# EAGLE board boneclamp_rB (EAGLE 6.4)
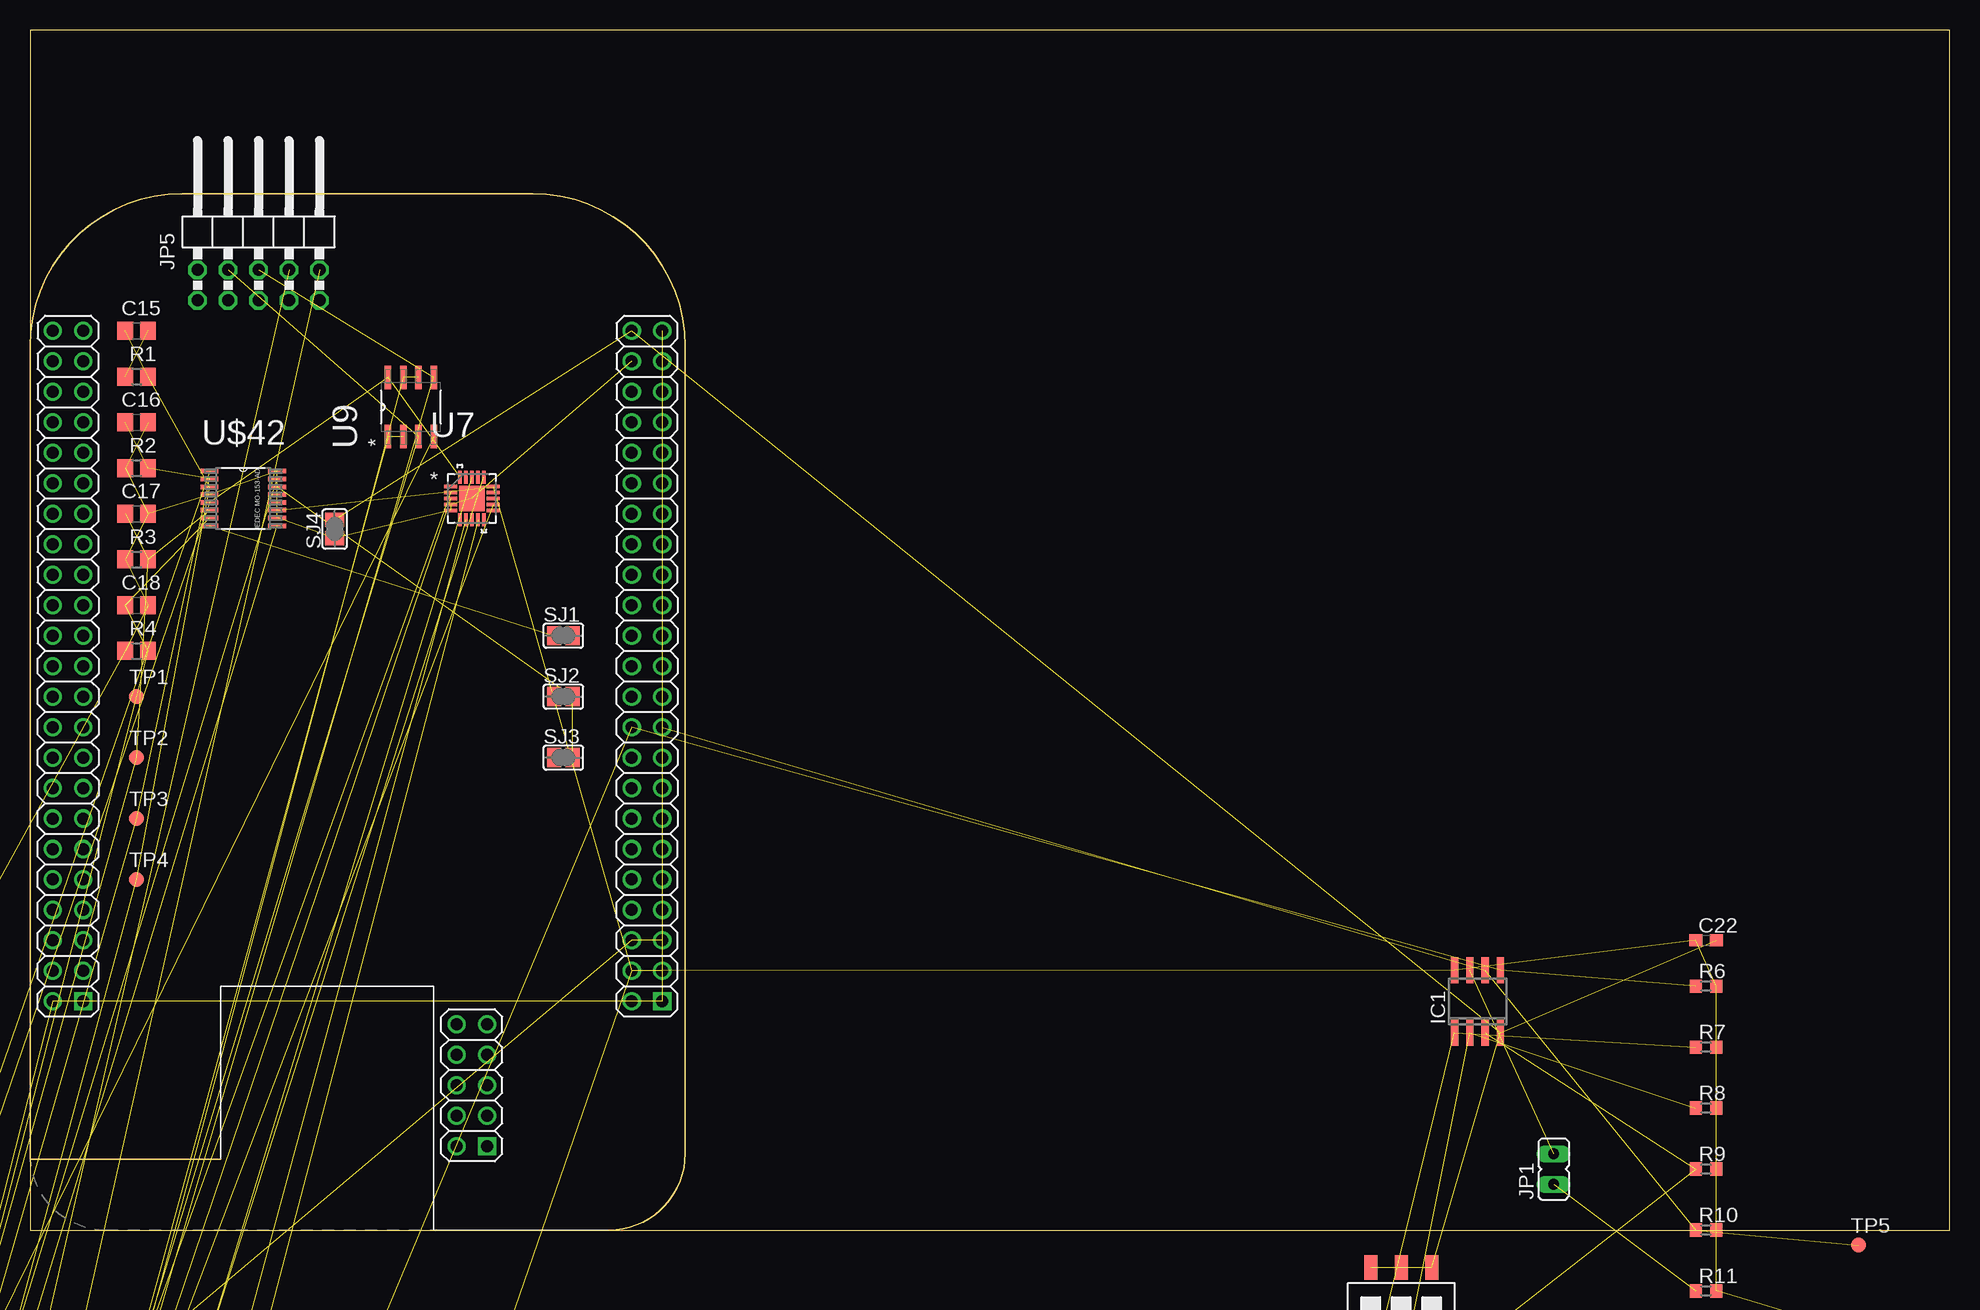
[diagram p0: board, top side]
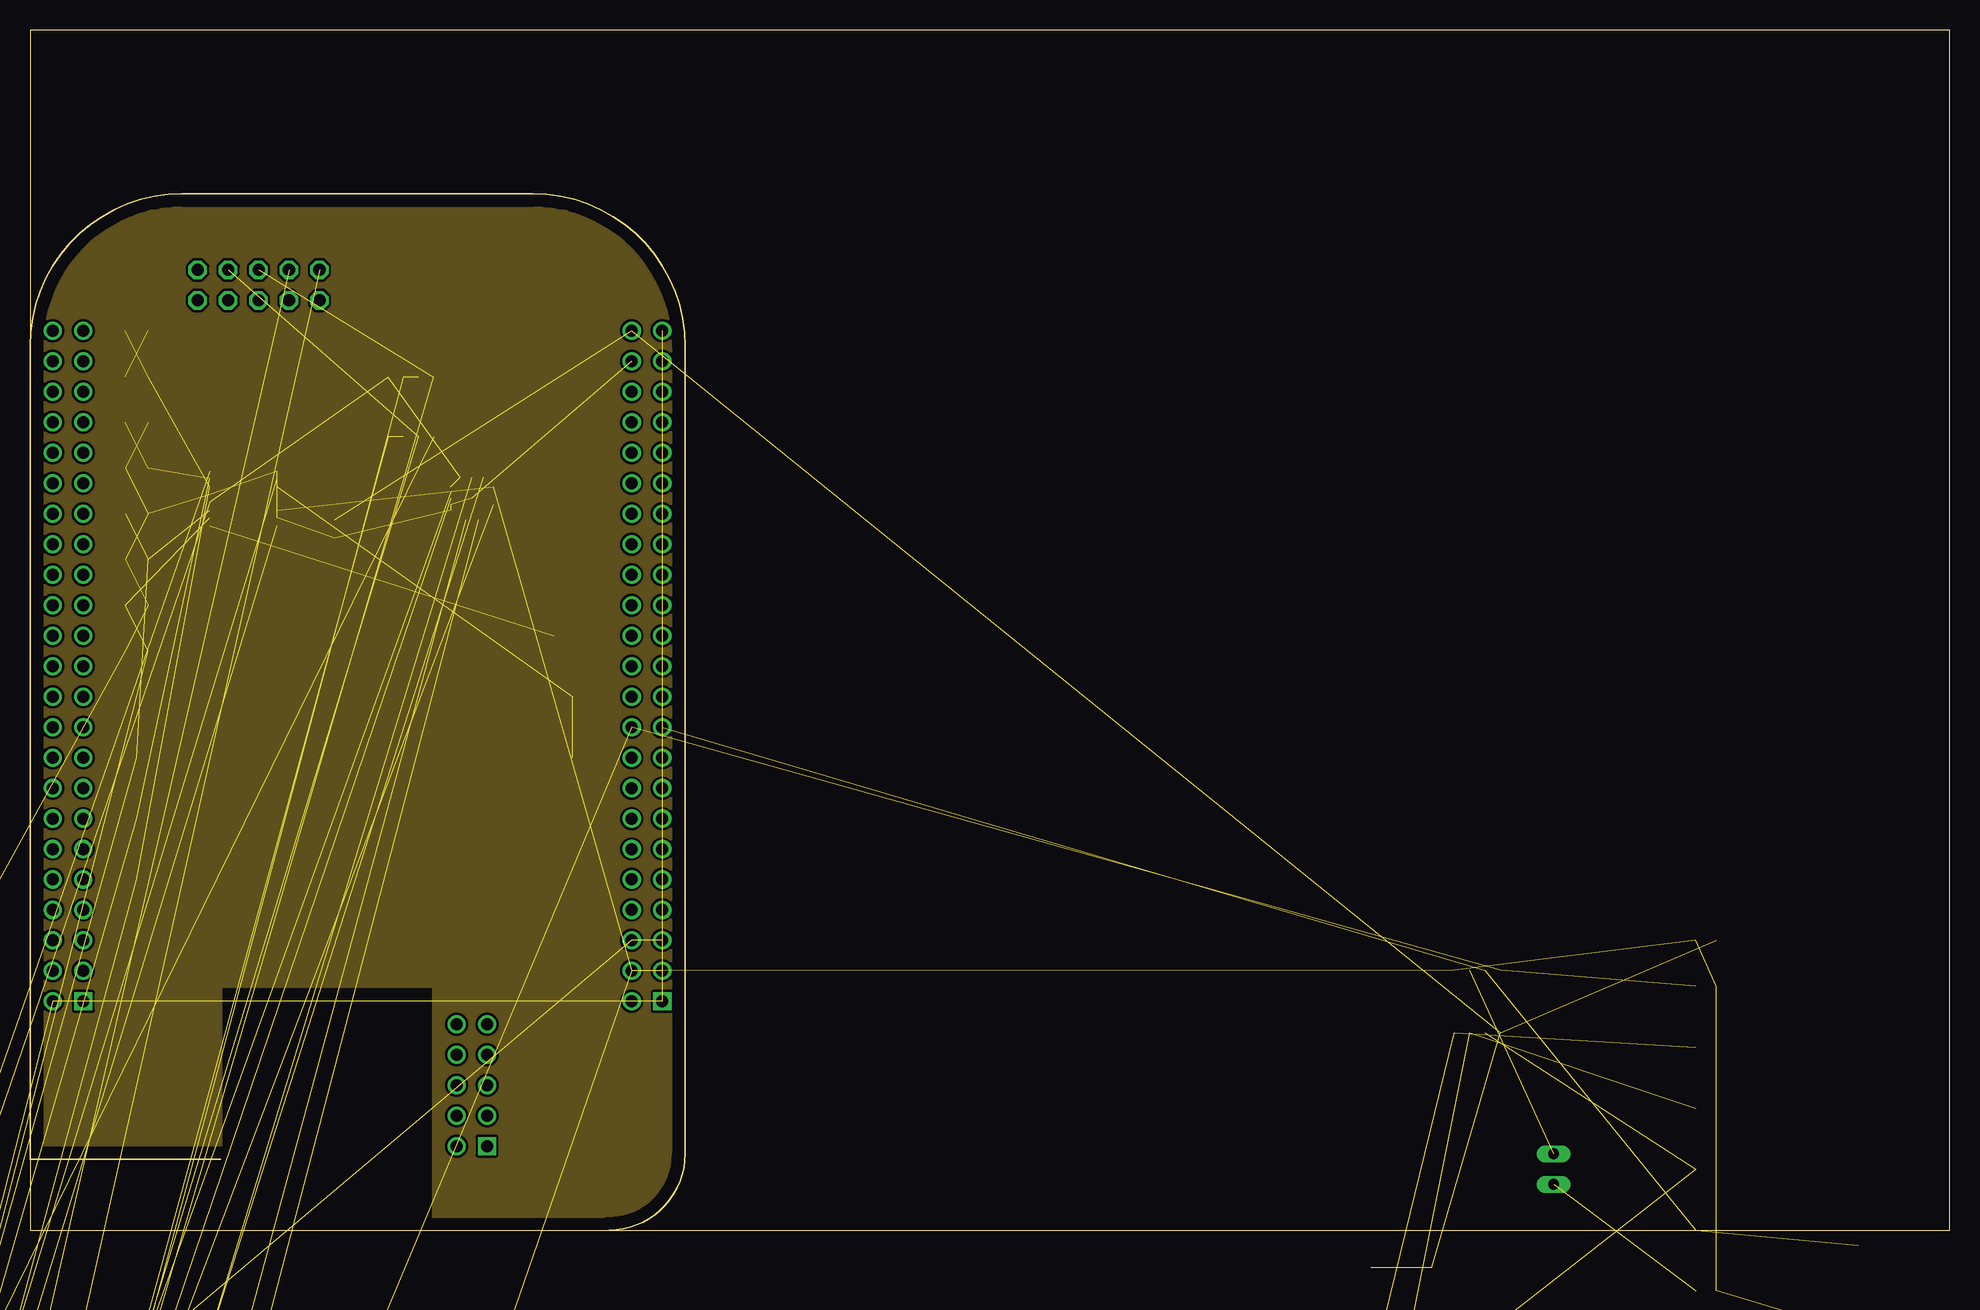
[diagram p1: board, inner layer Route2]
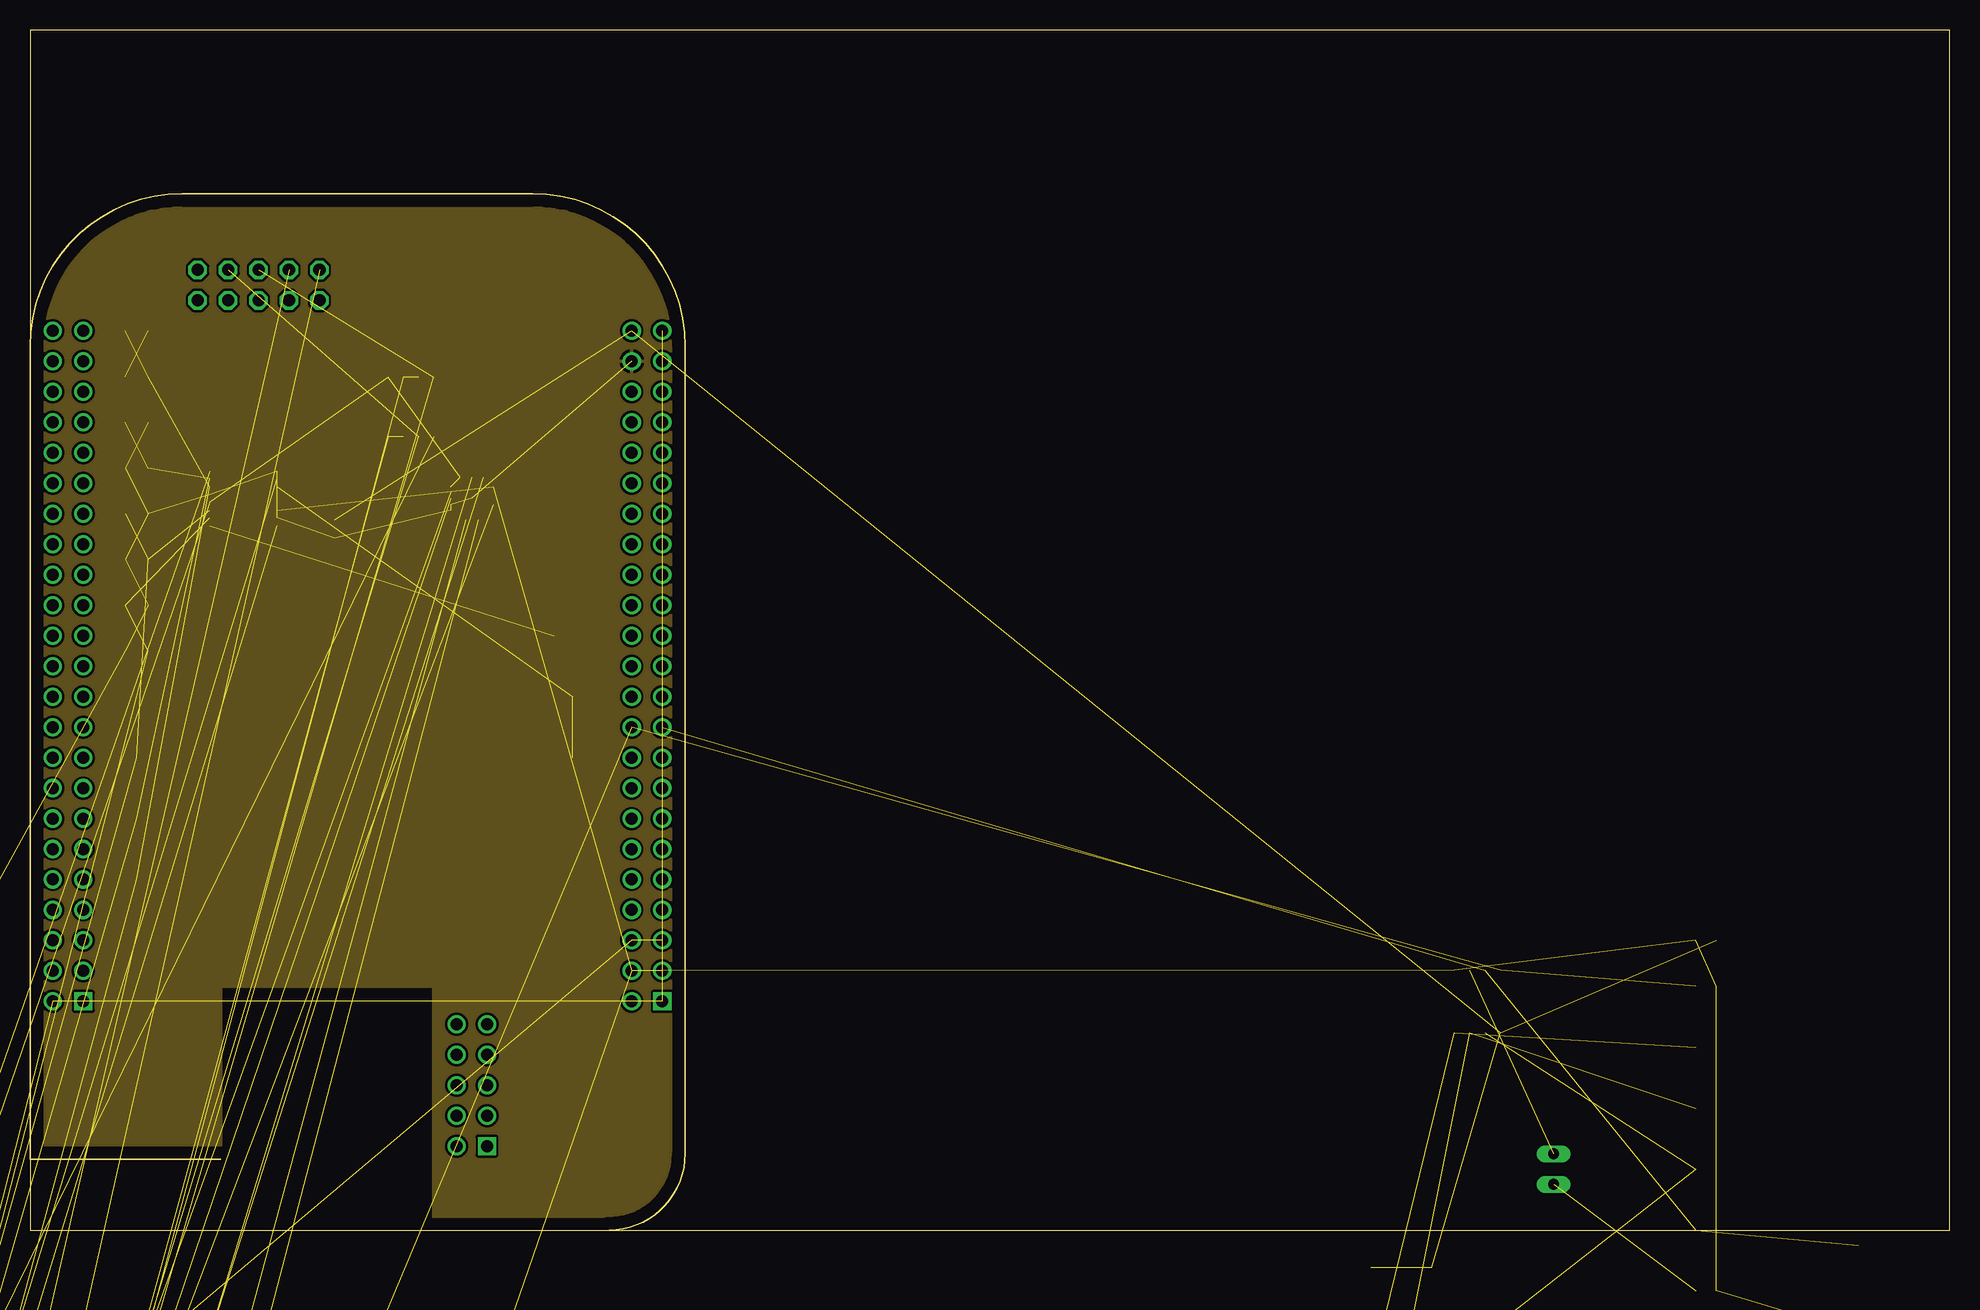
[diagram p2: board, inner layer Route15]

Size 160 x 100 mm. Coordinates in mm from the lower left corner, seen from the top.
Outline: 0,0 160,0 160,100 0,100 0,0
Copper layers (1+2*15+16): Top 0.035mm / dielectric 1.5mm / Route2 0.035mm / dielectric 0.15mm / Route15 0.035mm / dielectric 0.2mm / Bottom 0.035mm
Design rules "default *": minimum track width 10mil, minimum drill 24mil, track to track 8mil, track to pad 8mil, pad to pad 8mil, via to via 8mil, smd to smd 8mil, copper to edge 40mil, drill to drill 8mil, minimum pad ring 10mil, minimum via ring 8mil, stop-mask expansion 4mil, vias tented up to drill 0mil, thermal gap 10mil

## Footprints (pad centres in the part's own frame; a part is rotated, then mirrored left to right if it is on the bottom)
C0805 = smd 1.3 x 1.5: 1 -0.95,0; 2 0.95,0
C0603 = smd 1.1 x 1: 1 -0.85,0; 2 0.85,0
C025-025X050 = drill 0.813 octagon: 1 -1.27,0; 2 1.27,0
DO-219AB = smd 1.3 x 1.4: P$1 0,0; P$2 2.9,0
SO-08 = smd 0.6 x 2.2: 1 -1.905,-2.6; 2 -0.635,-2.6; 3 0.635,-2.6; 4 1.905,-2.6; 5 1.905,2.6; 6 0.635,2.6; 7 -0.635,2.6; 8 -1.905,2.6
JP1 = drill 0.914 long: 1 0,-1.27; 2 0,1.27
2X05/90 = drill 1.016 octagon: 1 -5.08,-5.08; 2 -5.08,-2.54; 3 -2.54,-5.08; 4 -2.54,-2.54; 5 0,-5.08; 6 0,-2.54; 7 2.54,-5.08; 8 2.54,-2.54; 9 5.08,-5.08; 10 5.08,-2.54
L4012M = smd 1.3 x 2.2: 1 -1.45,0; 2 1.45,0
R0805 = smd 1.3 x 1.5: 1 -0.95,0; 2 0.95,0
R0603 = smd 1 x 1.1: 1 -0.85,0; 2 0.85,0
R0805' = smd 1.3 x 1.5: 1 -0.85,0; 2 0.85,0
0204V = drill 0.813 octagon: 1 -1.27,0; 2 1.27,0
SMS-003 = smd 1.092 x 2.007: 1 -2.54,-4.496; 2 0,-4.496; 3 2.54,-4.496; 4 2.54,4.496; 5 0,4.496; 6 -2.54,4.496
SJ = smd 1.168 x 1.6: 1 -0.762,0; 2 0.762,0
B1,27 = smd 1.27 x 1.27: TP 0,0
SOIC127P600X175-8N = smd 1.981 x 0.559: 1 -2.464,1.905; 2 -2.464,0.635; 3 -2.464,-0.635; 4 -2.464,-1.905; 5 2.464,-1.905; 6 2.464,-0.635; 7 2.464,0.635; 8 2.464,1.905
SOT95P280X100-5N = smd 1.219 x 0.508: 1 -1.219,0.94; 2 -1.219,0; 3 -1.219,-0.94; 4 1.219,-0.94; 5 1.219,0.94
SOT95P280X110-5N = smd 1.321 x 0.559: 1 -1.295,0.94; 2 -1.295,0; 3 -1.295,-0.94; 4 1.295,-0.94; 5 1.295,0.94
SOIC127P1032X265-16N = smd 1.981 x 0.533: 1 -4.699,4.445; 2 -4.699,3.175; 3 -4.699,1.905; 4 -4.699,0.635; 5 -4.699,-0.635; 6 -4.699,-1.905; 7 -4.699,-3.175; 8 -4.699,-4.445; 9 4.699,-4.445; 10 4.699,-3.175; 11 4.699,-1.905; 12 4.699,-0.635; 13 4.699,0.635; 14 4.699,1.905; 15 4.699,3.175; 16 4.699,4.445
QFN50P400X400X100-21N = smd 1.067 x 0.305: 1 -1.778,0.991; 2 -1.778,0.508; 3 -1.778,0; 4 -1.778,-0.508; 5 -1.778,-0.991; 11 1.778,-0.991; 12 1.778,-0.508; 13 1.778,0; 14 1.778,0.508; 15 1.778,0.991 | smd 0.305 x 1.067: 6 -0.991,-1.778; 7 -0.508,-1.778; 8 0,-1.778; 9 0.508,-1.778; 10 0.991,-1.778; 16 0.991,1.778; 17 0.508,1.778; 18 0,1.778; 19 -0.508,1.778; 20 -0.991,1.778 | smd 2.108 x 2.108: 21 0,0
SON50P300X300X100-11N = smd 0.813 x 0.305: 1 -1.473,0.991; 2 -1.473,0.508; 3 -1.473,0; 4 -1.473,-0.508; 5 -1.473,-0.991; 6 1.473,-0.991; 7 1.473,-0.508; 8 1.473,0; 9 1.473,0.508; 10 1.473,0.991 | smd 1.651 x 2.388: 11 0,0
BEAGLEBONE_SHIELD = drill 1 square: 1 4.445,19.05; 47 52.705,19.05; 93 38.1,6.985 | drill 1: 2 1.905,19.05; 3 4.445,21.59; 4 1.905,21.59; 5 4.445,24.13; 6 1.905,24.13; 7 4.445,26.67; 8 1.905,26.67; 9 4.445,29.21; 10 1.905,29.21; 11 4.445,31.75; 12 1.905,31.75; 13 4.445,34.29; 14 1.905,34.29; 15 4.445,36.83; 16 1.905,36.83; 17 4.445,39.37; 18 1.905,39.37; 19 4.445,41.91; 20 1.905,41.91; 21 4.445,44.45; 22 1.905,44.45; 23 4.445,46.99; 24 1.905,46.99; 25 4.445,49.53; 26 1.905,49.53; 27 4.445,52.07; 28 1.905,52.07; 29 4.445,54.61; 30 1.905,54.61; 31 4.445,57.15; 32 1.905,57.15; 33 4.445,59.69; 34 1.905,59.69; 35 4.445,62.23; 36 1.905,62.23; 37 4.445,64.77; 38 1.905,64.77; 39 4.445,67.31; 40 1.905,67.31; 41 4.445,69.85; 42 1.905,69.85; 43 4.445,72.39; 44 1.905,72.39; 45 4.445,74.93; 46 1.905,74.93; 48 50.165,19.05; 49 52.705,21.59; 50 50.165,21.59; 51 52.705,24.13; 52 50.165,24.13; 53 52.705,26.67; 54 50.165,26.67; 55 52.705,29.21; 56 50.165,29.21; 57 52.705,31.75; 58 50.165,31.75; 59 52.705,34.29; 60 50.165,34.29; 61 52.705,36.83; 62 50.165,36.83; 63 52.705,39.37; 64 50.165,39.37; 65 52.705,41.91; 66 50.165,41.91; 67 52.705,44.45; 68 50.165,44.45; 69 52.705,46.99; 70 50.165,46.99; 71 52.705,49.53; 72 50.165,49.53; 73 52.705,52.07; 74 50.165,52.07; 75 52.705,54.61; 76 50.165,54.61; 77 52.705,57.15; 78 50.165,57.15; 79 52.705,59.69; 80 50.165,59.69; 81 52.705,62.23; 82 50.165,62.23; 83 52.705,64.77; 84 50.165,64.77; 85 52.705,67.31; 86 50.165,67.31; 87 52.705,69.85; 88 50.165,69.85; 89 52.705,72.39; 90 50.165,72.39; 91 52.705,74.93; 92 50.165,74.93; 94 35.56,6.985; 95 38.1,9.525; 96 35.56,9.525; 97 38.1,12.065; 98 35.56,12.065; 99 38.1,14.605; 100 35.56,14.605; 101 38.1,17.145; 102 35.56,17.145
MO-153-AB = smd 1.473 x 0.356: 1 -2.819,2.286; 2 -2.819,1.626; 3 -2.819,0.965; 4 -2.819,0.33; 5 -2.819,-0.33; 6 -2.819,-0.965; 7 -2.819,-1.626; 8 -2.819,-2.286; 9 2.819,-2.286; 10 2.819,-1.626; 11 2.819,-0.965; 12 2.819,-0.33; 13 2.819,0.33; 14 2.819,0.965; 15 2.819,1.626; 16 2.819,2.286
SOP63P500X150-16N = smd 1.75 x 0.3: 1 0,0; 2 0,-0.635; 3 0,-1.27; 4 0,-1.905; 5 0,-2.54; 6 0,-3.175; 7 0,-3.81; 8 0,-4.445; 9 5.2,-4.445; 10 5.2,-3.81; 11 5.2,-3.175; 12 5.2,-2.54; 13 5.2,-1.905; 14 5.2,-1.27; 15 5.2,-0.635; 16 5.2,0

## Placement (x,y rotation side)
C1  10uF  [C0805]  -111.76,-314.96 0 top  (outside the outline)
C2  0.1uF  [C0805]  -119.38,-355.6 0 top  (outside the outline)
C3  10uF  [C0805]  -119.38,-366.39 0 top  (outside the outline)
C4  0.1uF  [C0805]  -119.38,-372.75 0 top  (outside the outline)
C5  1uF  [C0603]  -83.82,-177.8 0 top  (outside the outline)
C6  10nF  [C0603]  -83.82,-184.15 0 top  (outside the outline)
C7  10uF  [C0603]  -83.82,-190.5 0 top  (outside the outline)
C8  1uF  [C0603]  -83.82,-229.87 0 top  (outside the outline)
C9  1uF  [C0603]  -83.82,-236.22 0 top  (outside the outline)
C10  10uF  [C0805]  -83.82,-254 0 top  (outside the outline)
C11  10uF  [C0805]  -83.82,-273.05 0 top  (outside the outline)
C12  0.1uF  [C0805]  -46.99,-261.62 0 top  (outside the outline)
C13  0.1uF  [C0805]  -83.82,-285.75 0 top  (outside the outline)
C14  0.1uF  [C0805]  -83.82,-292.1 0 top  (outside the outline)
C15  [C0805]  8.89,74.93 0 top
C16  [C0805]  8.89,67.31 0 top
C17  [C0805]  8.89,59.69 0 top
C18  [C0805]  8.89,52.07 0 top
C19  0.1uF  [C0805]  -119.38,-379.1 0 top  (outside the outline)
C20  10uF  [C0805]  -119.38,-385.44 0 top  (outside the outline)
C21  0.1uF  [C0805]  -119.38,-391.8 0 top  (outside the outline)
C22  0.1uF  [C0603]  139.7,24.13 0 top
C23  10uF  [C0603]  -60.96,-76.2 0 top  (outside the outline)
C24  22nF  [C0603]  -68.58,-76.2 0 top  (outside the outline)
C25  [C025-025X050]  -94.61,-448.31 0 top  (outside the outline)
C26  0.1uF  [C0603]  -72.39,-73.66 0 top  (outside the outline)
C27  4.7nF  [C0603]  -71.12,-77.47 0 top  (outside the outline)
C28  [C025-025X050]  -88.9,-448.31 0 top  (outside the outline)
C29  10nF  [C0603]  -83.82,-109.22 0 top  (outside the outline)
C30  4.7uF  [C0603]  -83.82,-115.57 0 top  (outside the outline)
C31  4.7uF  [C0603]  -83.82,-121.92 0 top  (outside the outline)
C32  4.7uF  [C0603]  -83.82,-128.27 0 top  (outside the outline)
C33  4.7uF  [C0603]  -83.82,-134.62 0 top  (outside the outline)
C34  0.22uF  [C0603]  -83.82,-153.67 0 top  (outside the outline)
C35  10pF  [C0603]  -83.82,-160.02 0 top  (outside the outline)
C36  [C025-025X050]  -83.19,-448.31 0 top  (outside the outline)
C37  [C025-025X050]  -77.47,-448.31 0 top  (outside the outline)
C38  [C025-025X050]  -118.11,-454.66 0 top  (outside the outline)
C39  [C025-025X050]  -112.39,-454.66 0 top  (outside the outline)
C40  0.1uF  [C0805]  -119.38,-463.55 0 top  (outside the outline)
C41  0.1uF  [C0805]  -119.38,-469.9 0 top  (outside the outline)
C42  2.7nF  [C0805]  -119.38,-481.33 0 top  (outside the outline)
C43  2.7nF  [C0805]  -119.38,-492.76 0 top  (outside the outline)
C44  10uF  [C0805]  -119.38,-499.11 0 top  (outside the outline)
C45  10uF  [C0805]  -119.38,-505.46 0 top  (outside the outline)
C46  0.1uF  [C0805]  -119.38,-511.81 0 top  (outside the outline)
C47  0.1uF  [C0805]  -119.38,-528.32 0 top  (outside the outline)
C48  0.1uF  [C0805]  -119.38,-534.67 0 top  (outside the outline)
C49  0.1uF  [C0805]  -119.38,-554.99 0 top  (outside the outline)
C50  0.1uF  [C0805]  -113.03,-554.99 0 top  (outside the outline)
C51  2.7nF  [C0805]  -106.68,-554.99 0 top  (outside the outline)
C52  2.7nF  [C0805]  -100.33,-554.99 0 top  (outside the outline)
C53  10uF  [C0805]  -106.68,-561.34 0 top  (outside the outline)
C54  10uF  [C0805]  -100.97,-561.34 0 top  (outside the outline)
C55  0.1uF  [C0805]  -119.38,-561.34 0 top  (outside the outline)
C56  0.1uF  [C0805]  -113.03,-561.34 0 top  (outside the outline)
D1  [DO-219AB]  -57.15,-74.93 0 top  (outside the outline)
IC1  24C  [SO-08]  120.65,19.05 0 top
JP1  [JP1]  127,5.08 0 top
JP5  PINHD-2X5/90  [2X05/90]  19.05,82.55 0 top
L1  4.7uH  [L4012M]  -83.82,-101.6 0 top  (outside the outline)
R1  [R0805]  8.89,71.12 0 top
R2  [R0805]  8.89,63.5 0 top
R3  [R0805]  8.89,55.88 0 top
R4  [R0805]  8.89,48.26 0 top
R5  100k  [R0603]  -60.96,-68.58 90 top  (outside the outline)
R6  5.6k  [R0603]  139.7,20.32 0 top
R7  4.75k  [R0603]  139.7,15.24 0 top
R8  4.75k  [R0603]  139.7,10.16 0 top
R9  4.75k  [R0603]  139.7,5.08 0 top
R10  5.6k  [R0603]  139.7,0 0 top
R11  10k  [R0603]  139.7,-5.08 0 top  (outside the outline)
R12  750  [R0603]  -83.82,-140.97 0 top  (outside the outline)
R13  150k  [R0603]  -83.82,-147.32 0 top  (outside the outline)
R14  1k  [R0805']  -83.82,-266.7 0 top  (outside the outline)
R15  10k,1%  [R0805']  -111.76,-321.31 0 top  (outside the outline)
R16  10k,1%  [R0805']  -111.76,-327.66 0 top  (outside the outline)
R17  10k  [R0805]  -119.38,-398.14 0 top  (outside the outline)
R18  10k  [R0805]  -119.38,-402.59 0 top  (outside the outline)
R19  6.937k  [0204V]  -118.11,-448.31 0 top  (outside the outline)
R20  10k  [0204V]  -105.41,-448.31 0 top  (outside the outline)
R21  6.66k  [0204V]  -111.12,-448.31 0 top  (outside the outline)
R22  10k  [0204V]  -100.33,-448.31 0 top  (outside the outline)
R23  [0204V]  -106.68,-454.02 0 top  (outside the outline)
R24  [0204V]  -101.6,-454.02 0 top  (outside the outline)
R25  [0204V]  -96.52,-454.02 0 top  (outside the outline)
R26  [0204V]  -91.44,-454.02 0 top  (outside the outline)
R27  [0204V]  -86.36,-454.02 0 top  (outside the outline)
R28  [0204V]  -81.28,-454.02 0 top  (outside the outline)
R29  [0204V]  -118.11,-459.11 0 top  (outside the outline)
R30  [0204V]  -113.03,-459.11 0 top  (outside the outline)
R31  0.1k  [R0805]  -119.38,-441.96 0 top  (outside the outline)
R32  33  [R0603]  -119.38,-475.62 0 top  (outside the outline)
R33  33  [R0603]  -119.38,-487.05 0 top  (outside the outline)
R34  590  [R0603]  -119.38,-517.52 0 top  (outside the outline)
R35  590  [R0603]  -119.38,-522.61 0 top  (outside the outline)
R36  33  [R0603]  -119.38,-567.05 0 top  (outside the outline)
R37  33  [R0603]  -114.3,-567.05 0 top  (outside the outline)
R38  0.1k  [R0805]  -113.67,-441.96 0 top  (outside the outline)
R39  10k  [R0805]  -96.52,-441.96 0 top  (outside the outline)
R40  10k  [R0805]  -90.81,-441.96 0 top  (outside the outline)
R41  10k  [R0805]  -85.09,-441.96 0 top  (outside the outline)
R42  10k  [R0805]  -79.38,-441.96 0 top  (outside the outline)
R43  0.1k  [R0805]  -107.95,-441.96 0 top  (outside the outline)
R44  0.1k  [R0805]  -102.23,-441.96 0 top  (outside the outline)
R45  590  [R0603]  -109.22,-567.05 0 top  (outside the outline)
R46  590  [R0603]  -104.14,-567.05 0 top  (outside the outline)
S2  SWS003  [SMS-003]  114.3,-7.62 0 top  (outside the outline)
SJ1  [SJ]  44.45,49.53 0 top
SJ2  [SJ]  44.45,44.45 0 top
SJ3  [SJ]  44.45,39.37 0 top
SJ4  [SJ]  25.4,58.42 90 top
SJ6  [SJ]  -83.82,-298.45 0 top  (outside the outline)
SJ7  [SJ]  -111.76,-334.01 0 top  (outside the outline)
SJ8  [SJ]  -111.76,-339.09 0 top  (outside the outline)
TP1  TPB1,27  [B1,27]  8.89,44.45 0 top
TP2  TPB1,27  [B1,27]  8.89,39.37 0 top
TP3  TPB1,27  [B1,27]  8.89,34.29 0 top
TP4  TPB1,27  [B1,27]  8.89,29.21 0 top
TP5  TPB1,27  [B1,27]  152.4,-1.27 0 top
TP6  TPB1,27  [B1,27]  157.48,-10.16 0 top  (outside the outline)
TP7  TPB1,27  [B1,27]  -119.38,-361.95 0 top  (outside the outline)
U1  AD8032ARZ-REEL7  [SOIC127P600X175-8N]  -110.49,-304.8 0 top  (outside the outline)
U2  LT1964ES5-5TRMPBF  [SOT95P280X100-5N]  -82.55,-168.91 0 top  (outside the outline)
U3  ADA4841-2YRZ  [SOIC127P600X175-8N]  -94.61,-413.38 0 top  (outside the outline)
U4  TLV70245DBVT  [SOT95P280X110-5N]  -82.55,-220.98 0 top  (outside the outline)
U5  ADA4841-2YRZ  [SOIC127P600X175-8N]  -116.84,-545.47 0 top  (outside the outline)
U6  AD713JRZ-16  [SOIC127P1032X265-16N]  -114.94,-415.93 0 top  (outside the outline)
U7  AD7682BCPZ  [QFN50P400X400X100-21N]  36.83,60.96 0 top
U8  TPS63700DRCT  [SON50P300X300X100-11N]  -60.96,-73.66 0 top  (outside the outline)
U9  ADA4841-2YRZ  [SOIC127P600X175-8N]  31.75,68.58 90 top
U10  ADA4841-2YRZ  [SOIC127P600X175-8N]  -116.84,-432.44 0 top  (outside the outline)
U11  ADA4841-2YRZ  [SOIC127P600X175-8N]  -93.98,-432.44 0 top  (outside the outline)
U$1  BEAGLEBONE_OUTLINE  [BEAGLEBONE_SHIELD]  0,0 0 top
U$42  AD5686  [MO-153-AB]  17.78,60.96 0 top
U$77  ADS8343  [SOP63P500X150-16N]  -120.02,-573.4 0 top  (outside the outline)

## Library data of the parts
C1-C24 C26 C27 C29-C35 C40-C56 R1-R13 R17 R18 R31-R46 = rcl
C25 C28 C36-C39 R14-R16 R19-R30 = resistor
D1 L1 = boneclamp
IC1 = on-semiconductor-01
JP1 SJ1-SJ4 SJ6-SJ8 = jumper
JP5 U$1 = adafruit
S2 = smd-special
TP1-TP7 = testpad
U1 = analog-devices-02; MPN: AD8032ARZ-REEL7; OC_FARNELL: unknown; OC_NEWARK: 82H2954; PACKAGE: SOIC-8; SUPPLIER: Analog Devices
U2 = linear-extended-01; MPN: LT1964ES5-5#TRMPBF; OC_FARNELL: 1663814; OC_NEWARK: 59M8319; PACKAGE: TSOT-23-5; SUPPLIER: Linear Technology
U3 U5 U9-U11 = analog-devices-01; MPN: ADA4841-2YRZ; OC_FARNELL: 1274192; OC_NEWARK: 19M0648; PACKAGE: SOIC-8; SUPPLIER: Analog Devices
U4 = ti-extended; MPN: TLV70025DDCR; OC_FARNELL: -; OC_NEWARK: 64R0678; PACKAGE: TSOT-23-5; SUPPLIER: Texas Instruments
U6 = analog-devices-01; MPN: AD713JRZ-16; OC_FARNELL: 1660969; OC_NEWARK: 59K4560; PACKAGE: SOIC-16; SUPPLIER: Analog Devices
U7 = analog-devices-02; MPN: AD7682BCPZ; OC_FARNELL: 2067751; OC_NEWARK: 14N5814; PACKAGE: 20-LFCSP; SUPPLIER: Analog Devices
U8 = ti-extended; MPN: TPS63700DRCT; OC_FARNELL: 1605461; OC_NEWARK: 61K1899; PACKAGE: SON-10; SUPPLIER: TEXAS INSTRUMENTS
U$42 = analog-devices-02
U$77 = ti-extended

## Nets
_ADC_A: C42.1 R32.1 R38.1 U7.16 U10.1
_ADC_B: C43.1 R31.1 R33.1 U7.18 U10.7
_ADC_C: C51.1 R36.1 R43.1 U7.7 U11.1
_ADC_D: C52.1 R37.1 R44.1 U7.9 U11.7
_DAC_A: C15.1 R1.2 R23.1 R30.2 TP4.TP U6.16 U$42.3
_DAC_B: C16.1 R2.2 R26.1 R27.2 TP3.TP U6.1 U$42.2
_DAC_C: C17.1 R3.2 R25.1 R28.2 TP2.TP U6.7 U$42.6
_DAC_D: C18.1 R4.2 R24.1 R29.2 TP1.TP U6.10 U$42.7
_VSS: C5.1 C29.1 C30.1 C31.1 C32.1 C33.1 C35.2 D1.P$2 R12.1 U2.2 U2.4 U8.8
ADC_A: JP5.4 U9.3 U10.3
ADC_B: JP5.6 U9.5 U10.5
ADC_C: JP5.8 U5.3 U11.3
ADC_CNV: U7.11
ADC_COM: JP5.2
ADC_D: JP5.10 U5.5 U11.5
ADC_SCLK: U7.13
ADC_SDI: SJ7.1
ADC_SDID: SJ8.1
ADC_SDO: SJ6.2
AGND: C1.2 C2.2 C3.2 C5.2 C6.2 C7.2 C8.2 C9.2 C10.2 C11.2 C12.2 C13.2 C14.2 C16.2 C17.2 C18.2 C19.2 C20.2 C21.2 C23.2 C24.2 C26.2 C27.2 C29.2 C30.2 C31.2 C32.2 C33.2 C34.2 C40.2 C41.2 C42.2 C43.2 C44.1 C45.2 C46.2 C47.2 C48.2 C49.2 C50.2 C51.2 C52.2 C53.1 C54.2 C55.2 C56.2 L1.2 R2.1 R3.1 R4.1 R16.2 SJ4.1 U1.4 U2.1 U4.2 U7.4 U7.5 U7.21 U8.2 U8.7 U8.11 U$1.90 U$42.4 U$42.10 U$42.16
AIN0: U$1.85
BAT_SENSE: U$1.95
BL_IN: U$1.97
BL_OUT: U$1.100
BL_SINK1: U$1.101
BL_SINK2: U$1.102
DAC_A: JP5.3
DAC_B: JP5.5
DAC_C: JP5.7
DAC_COM: JP5.1
DAC_CS: U$42.13
DAC_D: JP5.9
DAC_LDAC: R18.1 U$42.9
DAC_RST: R17.1 U$42.15
DAC_SCLK: U$42.12
DAC_SDI: SJ2.1
DAC_SDID: SJ3.1
DAC_SDO: SJ1.2
DGND: C22.2 IC1.4 S2.4 S2.5 S2.6 SJ4.2 U$1.92
GND: C25.1 C28.1 C36.1 C38.1 C39.1 U6.8 U6.9 U$1.1 U$1.2 U$1.47 U$1.48 U$1.89 U$1.91 U$77.10 U$77.11
I2C2_SCL: IC1.6 R10.1 TP5.TP U$1.65
I2C2_SDA: IC1.5 R6.1 TP7.TP U$1.66
N$1: R37.2 R45.1 U5.6 U5.7
N$2: R33.2 R34.1 U9.6 U9.7
N$3: R26.2 R30.1 U6.14
N$4: C1.1 R15.2 R16.1 U1.5
N$5: R36.2 R46.1 U5.1 U5.2
N$7: SJ1.1 U$42.8
N$8: SJ2.2 SJ3.2 U$42.14
N$9: SJ6.1
N$11: SJ7.2 SJ8.2 U7.12
N$14: IC1.1 R7.1 S2.1
N$16: C6.1 U2.3
N$17: C15.2 R1.1
N$18: IC1.2 R8.1 S2.2
N$19: IC1.3 R9.1 S2.3
N$20: R32.2 R35.1 U9.1 U9.2
N$21: IC1.7 JP1.2
N$22: JP1.1 R11.1
N$23: C26.1 R5.2 U8.3 U8.4
N$25: C27.1 U8.1
N$27: D1.P$1 L1.1 U8.6
N$28: C11.1 R14.2 U7.2
N$29: C10.1 R14.1 U1.3
N$30: C35.1 R12.2 R13.1 U8.9
N$31: C34.1 R13.2 U8.10
N$34: C14.1 U7.3
N$52: R25.2 R29.1 U6.12
N$53: C38.2 R21.1 R22.2 U3.5
N$54: C28.2 R19.1 R20.2 U3.3
N$55: R24.2 R28.1 U6.5
N$56: R23.2 R27.1 U6.3
N$57: C25.2 R20.1
N$58: C37.1
N$59: R22.1
PE: C4.2
SYS_5V: U$1.53
VBIAS: C46.1 C47.1 C48.1 C55.1 C56.1 R34.2 R35.2 R45.2 R46.2 U1.6 U1.7
VBIAS_DOWN: C39.2 U3.6 U3.7 U6.2 U6.6 U6.11 U6.15
VBIAS_UP: C36.2 R31.2 R38.2 R39.1 R39.2 R40.1 R40.2 R41.1 R41.2 R42.1 R42.2 R43.2 R44.2 U3.1 U3.2 U10.2 U10.6 U11.2 U11.6
VCC: U$77.1 U$77.9
VCOM: U7.10
VDD: C2.1 C3.1 C9.1 C13.1 C19.1 C20.1 C40.1 C45.1 C49.1 C54.1 R19.2 U1.8 U3.8 U4.5 U5.8 U6.4 U7.1 U7.20 U9.8 U10.8 U11.8 U$42.5
VDD_5V: C8.1 C23.1 C24.1 R5.1 U4.1 U4.3 U8.5 U$1.51 U$1.52
VDRIVE: C4.1 C12.1 C22.1 IC1.8 R6.2 R7.2 R8.2 R9.2 R10.2 R11.2 R17.2 R18.2 TP6.TP U7.15 U$1.49 U$1.50 U$42.11
VREF: C21.1 R15.1 U1.1 U1.2 U$42.1
VSS: C7.1 C41.1 C44.2 C50.1 C53.2 R21.2 U2.5 U3.4 U5.4 U6.13 U9.4 U10.4 U11.4

## Tracks (layer width: path | path; a pad name or v marks a point on that pad's centre or on a via)
_ADC_A  (4 unrouted)
_ADC_B  (4 unrouted)
_ADC_C  (4 unrouted)
_ADC_D  (4 unrouted)
_DAC_A  (6 unrouted)
_DAC_B  (6 unrouted)
_DAC_C  (6 unrouted)
_DAC_D  (6 unrouted)
_VSS  (11 unrouted)
ADC_A  (2 unrouted)
ADC_B  (2 unrouted)
ADC_C  (2 unrouted)
ADC_D  (2 unrouted)
AGND  (64 unrouted)
  pour Route15: 0,5.89 0,73.66 arc-90 12.7,86.36 41.91,86.36 arc-90 54.61,73.66 54.61,6.35 arc-90 48.26,0 33.66,0 33.66,20.32 15.88,20.32 15.88,5.89
DAC_LDAC  (1 unrouted)
DAC_RST  (1 unrouted)
DGND  (6 unrouted)
GND  (14 unrouted)
I2C2_SCL  (3 unrouted)
I2C2_SDA  (3 unrouted)
N$1  (3 unrouted)
N$2  (3 unrouted)
N$3  (2 unrouted)
N$4  (3 unrouted)
N$5  (3 unrouted)
N$7  (1 unrouted)
N$8  (2 unrouted)
N$11  (2 unrouted)
N$14  (2 unrouted)
N$16  (1 unrouted)
N$17  (1 unrouted)
N$18  (2 unrouted)
N$19  (2 unrouted)
N$20  (3 unrouted)
N$21  (1 unrouted)
N$22  (1 unrouted)
N$23  (3 unrouted)
N$25  (1 unrouted)
N$27  (2 unrouted)
N$28  (2 unrouted)
N$29  (2 unrouted)
N$30  (3 unrouted)
N$31  (2 unrouted)
N$34  (1 unrouted)
N$52  (2 unrouted)
N$53  (3 unrouted)
N$54  (3 unrouted)
N$55  (2 unrouted)
N$56  (2 unrouted)
N$57  (1 unrouted)
VBIAS  (10 unrouted)
VBIAS_DOWN  (6 unrouted)
VBIAS_UP  (18 unrouted)
VCC  (1 unrouted)
VDD  (21 unrouted)
  pour Route2: 0,5.89 0,73.66 arc-90 12.7,86.36 41.91,86.36 arc-90 54.61,73.66 54.61,6.35 arc-90 48.26,0 33.66,0 33.66,20.32 15.88,20.32 15.88,5.89
VDD_5V  (8 unrouted)
VDRIVE  (16 unrouted)
VREF  (4 unrouted)
VSS  (12 unrouted)